# Altium PCB PCB2.PcbDoc
Units mil, origin at the board's own origin, x right, y up, seen from the top; angles counter-clockwise.
Board outline 2534.41 x 3224.79 mil, 2 copper layers (Top Layer, Bottom Layer); 9 components, 17 nets, 79 pads, 4 vias.
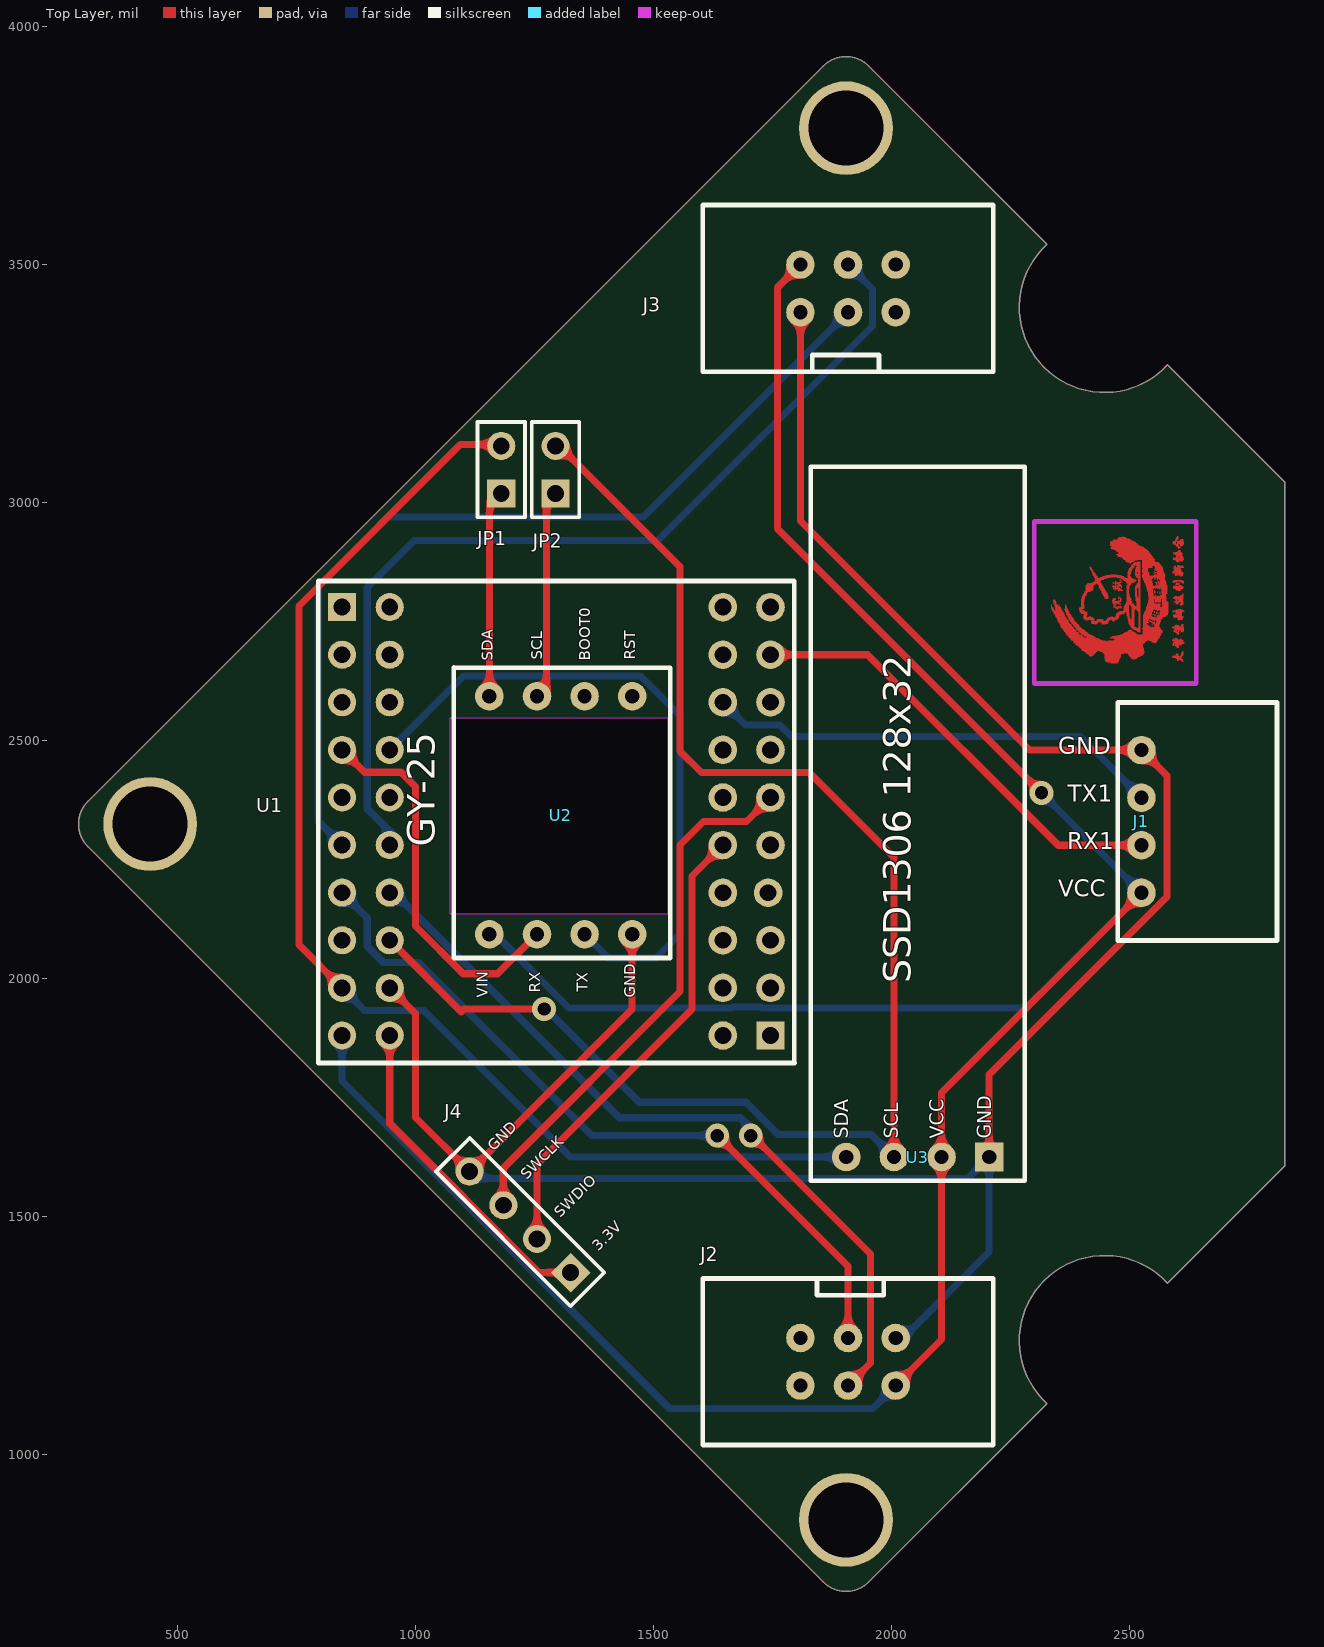
[diagram p0: Top Layer view]
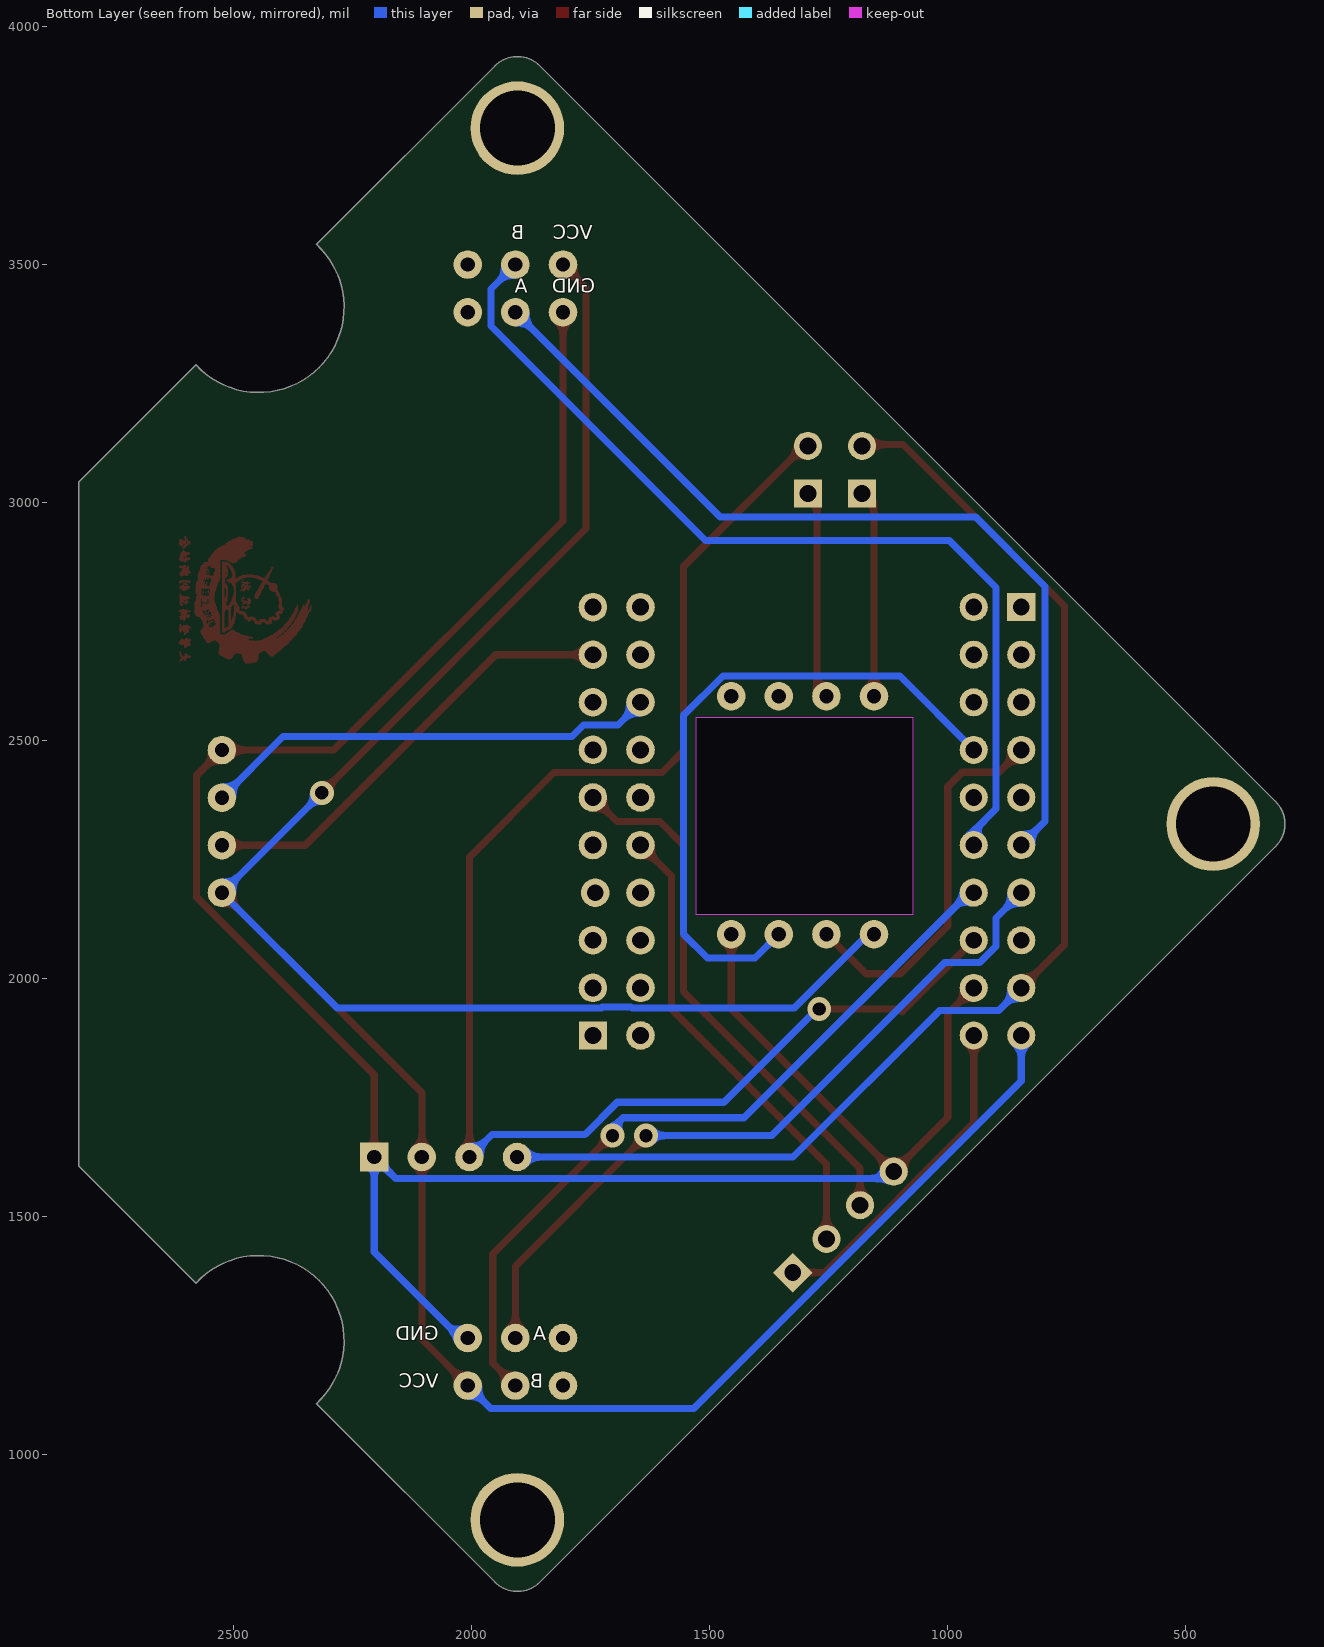
[diagram p1: Bottom Layer view, seen from below]

## Layer stack, top to bottom
Top Solder: solder mask 0.4, Solder Resist, Dk 3.5
Top Layer: signal copper 1.4
Dielectric 1: dielectric 12.6, FR-4, Dk 4.8
Bottom Layer: signal copper 1.4
Bottom Solder: solder mask 0.4, Solder Resist, Dk 3.5

## Board outline
1856.92,731.87 311.46,2277.34 cw(c358.78,2324.66) 311.46,2371.99 1856.92,3917.46 cw(c1904.25,3870.13) 1951.58,3917.46 2326.54,3542.49 ccw(c2447.52,3410.38) 2579.63,3289.4 2826.27,3042.76 2826.27,1606.57 2579.63,1359.93 ccw(c2447.52,1238.95) 2326.54,1106.84 1951.58,731.87 cw(c1904.25,779.2)
cut-out: 1073.03,2548.23 1483.02,2548.23 1530,2548.23 1530,2470 1530,2300 1530,2135.02 1310,2135.02 1195.02,2135.02 1138.01,2135.02 1108,2135.02 1080,2135.02 1073.03,2135.02 1073.03,2146.97 1073.03,2200 1073.03,2371.99

## Design rules (kind name [scope] priority, off if disabled: settings)
Clearance [All] p1: gap=5 ignorepadtopadclearanceinfootprint=FALSE except(0: Arc-Hole Track-Hole SMDPad-Hole THPad-Hole Via-Hole Fill-Hole Poly-Hole Region-Hole Text-Hole)
ComponentClearance [All] p1 off: gap=10 collisioncheckmode=3 verticalgap=10 showdistances=FALSE
PolygonConnect [All] p1: connectstyle=Relief reliefconductorwidth=10 reliefentries=4 polygonreliefangle="90 Angle" airgapwidth=10
RoutingVias [All] p1: holewidth=28 width=50 viastyle="Through Hole" minholewidth=28 minwidth=50 maxholewidth=28 maxwidth=50
SilkToSilkClearance [All] p1 off: silktosilkclearance=10
SilkToSolderMaskClearance [IsPad] p1 off: minsilkscreentomaskgap=10 clearancetoexposedcopper=TRUE
SolderMaskExpansion [All] p1: expansion=4
Width [All] p1: maxlimit=20 minlimit=10 preferedwidth=15 minimp=50.000000 maximp=50.000000 favimp=50.000000
27 further rules are at their usual default settings.

## Classes and differential pairs
component class Sheet1: J1 J3 J4 JP1 JP2

## Components (designator, comment, footprint, x,y, rotation, side; value= is the part's Value field where it differs from the comment)
J1 "XH2.54 x4" XH2.54 2425,2530 r0 top
J2 "ENcoder" 6pin2 2008.5,1244.82 r270 top
J3 "ENcoder" 6pin2 1808.5,3400 r90 top
J4 "Header 4" HDR1X4 1325.71,1382.28 r135 top
JP1 "Header 1" HDR1X2 1180,3019 r90 top
JP2 "Header 2" HDR1X2 1294,3019 r90 top
U1 "Stm32F103" STM32F103C8T6-4 845.59,2780.36 r0 top
U2 "GY25" PCBComponent_1 1155,2093 r90 top
U3 "SSD1306 128x32" "SSD1306 iic" 1830,1575 r90 top

## Footprints (in the part's own frame and the unit in brackets; to place one, negate y for a bottom-side part, rotate by r counter-clockwise, add the part's x,y. Pads: shape width x height; smd on the part's side, far side on the other; paste and mask are expansions set on the pad)
6pin2 [mil]
  round 60 hole 30: 1(0,0) 2(100,0) 3(0,-100) 4(100,-100) 5(0,-200) 6(100,-200)
  silkscreen extent -125,-405 225,205, body extent -125,-404 221,240, height 358
HDR1X2 [mm] "Connector; Header; 2 Position"
  rect 1.5x1.5 hole 0.9: 1(0,0)
  round 1.5 hole 0.9: 2(2.54,0)
  silkscreen extent -1.27,-1.27 3.81,1.27
HDR1X4 [mm] "Connector; Header; 4 Position"
  rect 1.5x1.5 hole 0.9: 1(0,0)
  round 1.5 hole 0.9: 2(2.54,0) 3(5.08,0) 4(7.62,0)
  silkscreen extent -1.27,-1.27 8.89,1.27
PCBComponent_1 [mil]
  round 60 hole 30: 1(0,0) 2(0,-100) 3(0,-200) 4(0,-300) 5(500,0) 6(500,-100) 7(500,-200) 8(500,-300)
  silkscreen extent -50,-380 560,75
"SSD1306 iic" [mil]
  round 60 hole 30: 1(50,-75) 2(50,-175) 3(50,-275)
  rect 60x60 hole 30: 4(50,-375)
  silkscreen extent 0,-450 1500,0, body extent 186,-361 1395,1, height 93
STM32F103C8T6-4 [mm]
  rect 1.5x1.5 hole 0.9: 1(0,0) 21(22.86,-22.86)
  round 1.5 hole 0.9: 2(2.54,0) 3(0,-2.54) 4(2.54,-2.54) 5(0,-5.08) 6(2.54,-5.08) 7(0,-7.62) 8(2.54,-7.62) 9(0,-10.16) 10(2.54,-10.16) 11(0,-12.7) 12(2.54,-12.7) 13(0,-15.24) 14(2.54,-15.24) 15(0,-17.78) 16(2.54,-17.78) 17(0,-20.32) 18(2.54,-20.32) 19(0,-22.86) 20(2.54,-22.86)
  round 1.524 hole 0.899: 22(20.32,-22.86) 23(22.86,-20.32) 24(20.32,-20.32) 25(22.86,-17.78) 26(20.32,-17.78) 27(22.733,-15.24) 28(20.32,-15.24) 29(22.86,-12.7) 30(20.32,-12.7) 31(22.86,-10.16) 32(20.32,-10.16) 33(22.86,-7.62) 34(20.32,-7.62) 35(22.86,-5.08) 36(20.32,-5.08) 37(22.86,-2.54) 38(20.32,-2.54) 39(22.86,0) 40(20.32,0)
  silkscreen extent -1.27,-24.33 24.16,1.4
XH2.54 [mil]
  round 60 hole 30: 1(100,-350) 2(100,-250) 3(100,-150) 4(100,-50)
  silkscreen extent 50,-450 385,50, body extent 85,-446 384,46, height 232

## Part data
J4: "Header, 4-Pin"
JP1: library part "Header 2", "Header, 2-Pin"
JP2: "Header, 2-Pin"
U1: library part Component_1

## Free pads (board coordinates)
  round 196.85 hole 157.48: 2(442.3,2324.66) 2(1904.25,862.72) 2(1904.25,3786.61)

## Via types
v1: diameter 50, hole 28, Top Layer to Bottom Layer, 4 vias

## Nets (pads, with @x,y where several pads share a name; then routed paths per layer and width w, separated by ;. In a path a pad name is that pad's centre, name@x,y a point inside that pad or via, vN(x,y) a via of type N, cw(c..) or ccw(c..) an arc to the next point about the centre after c; other vN are vias at no path point)
3.3V: J4.1 U1.20 | length 694.5
  Top Layer w15: U1.20 945.59,1695.9 1259.2,1382.28 J4.1
GND: J1.4 J2.1 J3.1 J4.4 U1.18 U2.4 U3.4 | length 5071.6
  Top Layer w15: U1.18 1000,1925.94 1000,1707.99 J4.4 1455,1935.83 U2.4 ; J3.1 1808.5,2961.5 2290,2480 J1.4 2578.8,2426.2 2578.8,2171.7 2205,1797.9 U3.4
  Bottom Layer w15: J4.4 1127.99,1580 2160,1580 U3.4 2205,1425.39 2024.43,1244.82 J2.1 ; U2.4@1455,2090.47 U2.4
INT0A: J2.3 U1.13 | length 1573.4
  Top Layer w15: v1(1633.9,1670) 1908.5,1395.4 J2.3
  Bottom Layer w15: U1.13 898.56,2127.39 898.56,2067.95 933.18,2033.33 1006.67,2033.33 1370,1670 v1(1633.9,1670)
INT0B: J2.4 U1.14 | length 1668.1
  Top Layer w15: v1(1704.29,1670) 1706.96,1670 1956,1420.97 1956,1192.32 J2.4
  Bottom Layer w15: U1.14@945.59,2161.81 U1.14 945.59,2189.77 1427.86,1707.5 1682.5,1707.5 1704.29,1685.71 v1(1704.29,1670) v1@1704.29,1663.71
INT1A: J3.3 U1.11 | length 1915.6
  Bottom Layer w15: U1.11 795.59,2330.36 795.59,2823.59 942,2970 1478.5,2970 J3.3
INT1B: J3.4 U1.12 | length 2000
  Bottom Layer w15: U1.12 945.59,2309.59 898.56,2356.61 898.56,2821.58 996.98,2920 1508.9,2920 1960,3371.1 1960,3448.5 J3.4
NetJP1_1: JP1.1 U2.5 | length 437.3
  Top Layer w15: U2.5 1155,3002 JP1.1@1175,3022
NetJP2_1: JP2.1 U2.6 | length 442.2
  Top Layer w15: U2.6 1275,2613 1275,3000 JP2.1
RX1: J1.2 U1.37 | length 945.2
  Top Layer w15: U1.37 1949.64,2680.36 2350,2280 J1.2
SCL: JP2.2 U1.16 U3.2 | length 3199.8
  Top Layer w15: U1.16 1095.94,1930 1101.78,1935.83 v1(1270,1935.83) ; JP2.2@1282.97,3126.18 1287.51,3133.15 1555.63,2865.02 1555.63,2477.7 1600.47,2432.86 1827.14,2432.86 2005,2255 U3.2
  Bottom Layer w15: v1@1265,1925 1285,1925 1470,1740 1694.4,1740 1761.9,1672.5 1957.5,1672.5 U3.2
SDA: JP1.2 U1.17 U3.1 | length 2607.3
  Top Layer w15: U1.17 754.87,2071.07 754.87,2782.87 1094,3122 JP1.2@1175,3122
  Bottom Layer w15: U1.17 893,1932.94 1017.06,1932.94 1325,1625 U3.1
stm32RX: U1.8 U2.3 | length 1409.8
  Bottom Layer w15: U1.8 1100.73,2635.5 1472.6,2635.5 1555.63,2552.47 1555.63,2093.74 1504.9,2043 1405,2043 U2.3
stm32TX: U1.7 U2.2 | length 810.2
  Top Layer w15: U1.7 892.61,2433.33 969.67,2433.33 1000,2403 1000,2110.06 1100.06,2010 1172,2010 U2.2
SWCLK: J4.3 U1.31 | length 1142
  Top Layer w15: J4.3 1184.29,1601.27 1555.63,1972.62 1555.63,2280.69 1604.95,2330 1695.23,2330 U1.31
SWDIO: J4.2 U1.30 | length 989.2
  Top Layer w15: J4.2 1255,1610 1580.63,1935.63 1580.63,2215.41 U1.30
TX1: J1.3 U1.36 | length 962.4
  Bottom Layer w15: U1.36 1693.09,2532.86 1765.26,2532.86 1789.73,2508.39 2396.61,2508.39 J1.3
VCC: J1.1 J2.2 J3.2 U1.19 U2.1 U3.3 | length 6028.1
  Top Layer w15: J3.2 1760,3451.5 1760,2945.23 2315,2390.23 v1(2315,2390) ; J2.2 2105,1241.32 U3.3 2105,1760 J1.1 J1.1@2525,2202.3
  Bottom Layer w15: U1.19 845.59,1784.41 1533,1097 1960.68,1097 J2.2 ; U2.1 1167.37,2093 1322.51,1937.86 1663.19,1937.86 1665.33,1940 1725.84,1940 1727.98,1937.86 2282.86,1937.86 J1.1 v1(2315,2390)
pads on no net: J2.5 J2.6 J3.5 J3.6 U1.1 U1.2 U1.3 U1.4 U1.5 U1.6 U1.9 U1.10 U1.15 U1.21 U1.22 U1.23 U1.24 U1.25 U1.26 U1.27 U1.28 U1.29 U1.32 U1.33 U1.34 U1.35 U1.38 U1.39 U1.40 U2.7 U2.8
copper on no net: | length 18448.3
  Top Layer w1.3: 2337,2775.8 2337,2784.9 ; 2338.3,2771.9 2338.3,2779.7 ; 2339.6,2771.9 2339.6,2779.7 ; 2340.9,2770.6 2340.9,2775.8 ; 2340.9,2790.1 2340.9,2795.3 ; 2342.2,2766.7 2342.2,2774.5 ; 2342.2,2787.5 2342.2,2795.3 ; 2343.5,2765.4 2343.5,2773.2 ; 2343.5,2782.3 2343.5,2795.3 ; 2344.8,2761.5 2344.8,2773.2 ; 2344.8,2775.8 2344.8,2792.7 ; 2346.1,2758.9 2346.1,2790.1 ; 2347.4,2757.6 2347.4,2786.2 ; 2348.7,2753.7 2348.7,2784.9 ; 2350,2751.1 2350,2782.3 ; 2351.3,2748.5 2351.3,2782.3 ; 2352.6,2747.2 2352.6,2784.9 ; 2353.9,2744.6 2353.9,2781 ; 2355.2,2742 2355.2,2779.7 ; 2356.5,2739.4 2356.5,2777.1 ; 2357.8,2736.8 2357.8,2775.8 ; 2359.1,2735.5 2359.1,2773.2 ; 2360.4,2734.2 2360.4,2770.6 ; 2361.7,2731.6 2361.7,2768 ; 2363,2730.3 2363,2766.7 ; 2364.3,2729 2364.3,2764.1 ; 2364.3,2774.5 2364.3,2775.8 ; 2365.6,2726.4 2365.6,2760.2 ; 2365.6,2770.6 2365.6,2784.9 ; 2366.9,2725.1 2366.9,2757.6 ; 2366.9,2769.3 2366.9,2783.6 ; 2368.2,2722.5 2368.2,2756.3 ; 2368.2,2765.4 2368.2,2781 ; 2369.5,2721.2 2369.5,2755 ; 2369.5,2762.8 2369.5,2778.4 ; 2370.8,2719.9 2370.8,2752.4 ; 2370.8,2758.9 2370.8,2774.5 ; 2372.1,2718.6 2372.1,2749.8 ; 2372.1,2757.6 2372.1,2771.9 ; 2373.4,2717.3 2373.4,2747.2 ; 2373.4,2753.7 2373.4,2769.3 ; 2374.7,2716 2374.7,2745.9 ; 2374.7,2752.4 2374.7,2766.7 ; 2376,2714.7 2376,2744.6 ; 2376,2751.1 2376,2765.4 ; 2377.3,2712.1 2377.3,2743.3 ; 2377.3,2749.8 2377.3,2762.8 ; 2378.6,2710.8 2378.6,2740.7 ; 2378.6,2747.2 2378.6,2760.2 ; 2379.9,2710.8 2379.9,2739.4 ; 2379.9,2745.9 2379.9,2758.9 ; 2381.2,2709.5 2381.2,2738.1 ; 2381.2,2743.3 2381.2,2757.6 ; 2382.5,2708.2 2382.5,2736.8 ; 2382.5,2742 2382.5,2755 ; 2383.8,2705.6 2383.8,2734.2 ; 2383.8,2740.7 2383.8,2753.7 ; 2385.1,2704.3 2385.1,2734.2 ; 2385.1,2739.4 2385.1,2751.1 ; 2386.4,2704.3 2386.4,2732.9 ; 2386.4,2738.1 2386.4,2749.8 ; 2387.7,2701.7 2387.7,2731.6 ; 2387.7,2735.5 2387.7,2748.5 ; 2389,2701.7 2389,2729 ; 2389,2734.2 2389,2747.2 ; 2390.3,2700.4 2390.3,2727.7 ; 2390.3,2732.9 2390.3,2745.9 ; 2391.6,2699.1 2391.6,2727.7 ; 2391.6,2731.6 2391.6,2744.6 ; 2392.9,2697.8 2392.9,2726.4 ; 2392.9,2730.3 2392.9,2743.3 ; 2394.2,2697.8 2394.2,2723.8 ; 2394.2,2729 2394.2,2740.7 ; 2395.5,2696.5 2395.5,2722.5 ; 2395.5,2727.7 2395.5,2739.4 ; 2395.5,2774.5 2395.5,2778.4 ; 2396.8,2695.2 2396.8,2722.5 ; 2396.8,2726.4 2396.8,2738.1 ; 2396.8,2769.3 2396.8,2779.7 ; 2398.1,2692.6 2398.1,2721.2 ; 2398.1,2725.1 2398.1,2736.8 ; 2398.1,2768 2398.1,2779.7 ; 2399.4,2691.3 2399.4,2721.2 ; 2399.4,2723.8 2399.4,2735.5 ; 2399.4,2766.7 2399.4,2796.6 ; 2400.7,2690 2400.7,2719.9 ; 2400.7,2722.5 2400.7,2734.2 ; 2400.7,2766.7 2400.7,2800.5 ; 2402,2688.7 2402,2718.6 ; 2402,2722.5 2402,2734.2 ; 2402,2766.7 2402,2773.2 ; 2402,2775.8 2402,2804.4 ; 2403.3,2688.7 2403.3,2717.3 ; 2403.3,2721.2 2403.3,2732.9 ; 2403.3,2757.6 2403.3,2760.2 ; 2403.3,2766.7 2403.3,2773.2 ; 2403.3,2777.1 2403.3,2807 ; 2404.6,2687.4 2404.6,2717.3 ; 2404.6,2721.2 2404.6,2732.9 ; 2404.6,2756.3 2404.6,2762.8 ; 2404.6,2766.7 2404.6,2773.2 ; 2404.6,2778.4 2404.6,2784.9 ; 2404.6,2792.7 2404.6,2809.6 ; 2405.9,2686.1 2405.9,2714.7 ; 2405.9,2718.6 2405.9,2731.6 ; 2405.9,2755 2405.9,2773.2 ; 2405.9,2799.2 2405.9,2810.9 ; 2407.2,2686.1 2407.2,2714.7 ; 2407.2,2718.6 2407.2,2730.3 ; 2407.2,2753.7 2407.2,2771.9 ; 2407.2,2803.1 2407.2,2813.5 ; 2408.5,2684.8 2408.5,2714.7 ; 2408.5,2717.3 2408.5,2729 ; 2408.5,2752.4 2408.5,2770.6 ; 2408.5,2804.4 2408.5,2826.5 ; 2409.8,2683.5 2409.8,2714.7 ; 2409.8,2717.3 2409.8,2727.7 ; 2409.8,2752.4 2409.8,2758.9 ; 2409.8,2761.5 2409.8,2769.3 ; 2409.8,2807 2409.8,2827.8 ; 2411.1,2682.2 2411.1,2726.4 ; 2411.1,2752.4 2411.1,2757.6 ; 2411.1,2764.1 2411.1,2768 ; 2411.1,2809.6 2411.1,2827.8 ; 2412.4,2682.2 2412.4,2726.4 ; 2412.4,2752.4 2412.4,2757.6 ; 2412.4,2812.2 2412.4,2829.1 ; 2413.7,2680.9 2413.7,2725.1 ; 2413.7,2752.4 2413.7,2758.9 ; 2413.7,2812.2 2413.7,2830.4 ; 2415,2679.6 2415,2723.8 ; 2415,2753.7 2415,2760.2 ; 2415,2812.2 2415,2830.4 ; 2416.3,2678.3 2416.3,2723.8 ; 2416.3,2753.7 2416.3,2760.2 ; 2416.3,2812.2 2416.3,2830.4 ; 2417.6,2677 2417.6,2722.5 ; 2417.6,2755 2417.6,2761.5 ; 2417.6,2812.2 2417.6,2830.4 ; 2417.6,2861.6 2417.6,2865.5 ; 2418.9,2677 2418.9,2721.2 ; 2418.9,2753.7 2418.9,2760.2 ; 2418.9,2813.5 2418.9,2830.4 ; 2418.9,2859 2418.9,2864.2 ; 2420.2,2677 2420.2,2721.2 ; 2420.2,2747.2 2420.2,2758.9 ; 2420.2,2814.8 2420.2,2830.4 ; 2420.2,2856.4 2420.2,2862.9 ; 2421.5,2677 2421.5,2721.2 ; 2421.5,2745.9 2421.5,2758.9 ; 2421.5,2814.8 2421.5,2830.4 ; 2421.5,2853.8 2421.5,2860.3 ; 2422.8,2678.3 2422.8,2719.9 ; 2422.8,2745.9 2422.8,2757.6 ; 2422.8,2816.1 2422.8,2831.7 ; 2422.8,2851.2 2422.8,2857.7 ; 2424.1,2679.6 2424.1,2718.6 ; 2424.1,2745.9 2424.1,2757.6 ; 2424.1,2817.4 2424.1,2833 ; 2424.1,2847.3 2424.1,2856.4 ; 2425.4,2680.9 2425.4,2718.6 ; 2425.4,2745.9 2425.4,2756.3 ; 2425.4,2826.5 2425.4,2833 ; 2425.4,2844.7 2425.4,2853.8 ; 2426.7,2682.2 2426.7,2717.3 ; 2426.7,2744.6 2426.7,2751.1 ; 2426.7,2827.8 2426.7,2834.3 ; 2426.7,2842.1 2426.7,2852.5 ; 2428,2683.5 2428,2717.3 ; 2428,2744.6 2428,2751.1 ; 2428,2827.8 2428,2835.6 ; 2428,2840.8 2428,2851.2 ; 2429.3,2684.8 2429.3,2716 ; 2429.3,2744.6 2429.3,2751.1 ; 2429.3,2829.1 2429.3,2848.6 ; 2430.6,2686.1 2430.6,2714.7 ; 2430.6,2744.6 2430.6,2751.1 ; 2430.6,2830.4 2430.6,2846 ; 2431.9,2687.4 2431.9,2714.7 ; 2431.9,2745.9 2431.9,2753.7 ; 2431.9,2830.4 2431.9,2844.7 ; 2433.2,2688.7 2433.2,2714.7 ; 2433.2,2747.2 2433.2,2755 ; 2433.2,2829.1 2433.2,2842.1 ; 2434.5,2688.7 2434.5,2713.4 ; 2434.5,2748.5 2434.5,2755 ; 2434.5,2827.8 2434.5,2840.8 ; 2435.8,2688.7 2435.8,2713.4 ; 2435.8,2748.5 2435.8,2755 ; 2435.8,2825.2 2435.8,2840.8 ; 2437.1,2688.7 2437.1,2712.1 ; 2437.1,2749.8 2437.1,2755 ; 2437.1,2821.3 2437.1,2840.8 ; 2438.4,2687.4 2438.4,2712.1 ; 2438.4,2749.8 2438.4,2755 ; 2438.4,2818.7 2438.4,2842.1 ; 2439.7,2687.4 2439.7,2712.1 ; 2439.7,2749.8 2439.7,2755 ; 2439.7,2817.4 2439.7,2831.7 ; 2439.7,2835.6 2439.7,2842.1 ; 2441,2686.1 2441,2710.8 ; 2441,2747.2 2441,2755 ; 2441,2814.8 2441,2830.4 ; 2441,2836.9 2441,2843.4 ; 2442.3,2686.1 2442.3,2710.8 ; 2442.3,2744.6 2442.3,2755 ; 2442.3,2810.9 2442.3,2827.8 ; 2442.3,2838.2 2442.3,2843.4 ; 2443.6,2686.1 2443.6,2709.5 ; 2443.6,2744.6 2443.6,2755 ; 2443.6,2808.3 2443.6,2825.2 ; 2443.6,2838.2 2443.6,2843.4 ; 2444.9,2684.8 2444.9,2709.5 ; 2444.9,2744.6 2444.9,2753.7 ; 2444.9,2807 2444.9,2823.9 ; 2444.9,2838.2 2444.9,2844.7 ; 2446.2,2683.5 2446.2,2709.5 ; 2446.2,2744.6 2446.2,2751.1 ; 2446.2,2804.4 2446.2,2821.3 ; 2446.2,2838.2 2446.2,2844.7 ; 2447.5,2680.9 2447.5,2709.5 ; 2447.5,2744.6 2447.5,2751.1 ; 2447.5,2801.8 2447.5,2818.7 ; 2447.5,2839.5 2447.5,2844.7 ; 2448.8,2670.5 2448.8,2709.5 ; 2448.8,2744.6 2448.8,2751.1 ; 2448.8,2799.2 2448.8,2816.1 ; 2448.8,2839.5 2448.8,2846 ; 2450.1,2667.9 2450.1,2709.5 ; 2450.1,2744.6 2450.1,2751.1 ; 2450.1,2797.9 2450.1,2814.8 ; 2450.1,2839.5 2450.1,2846 ; 2451.4,2665.3 2451.4,2708.2 ; 2451.4,2745.9 2451.4,2752.4 ; 2451.4,2797.9 2451.4,2812.2 ; 2451.4,2840.8 2451.4,2846 ; 2452.7,2664 2452.7,2708.2 ; 2452.7,2745.9 2452.7,2755 ; 2452.7,2797.9 2452.7,2810.9 ; 2452.7,2840.8 2452.7,2847.3 ; 2454,2664 2454,2708.2 ; 2454,2745.9 2454,2756.3 ; 2454,2799.2 2454,2808.3 ; 2454,2840.8 2454,2847.3 ; 2455.3,2664 2455.3,2709.5 ; 2455.3,2747.2 2455.3,2757.6 ; 2455.3,2799.2 2455.3,2805.7 ; 2455.3,2842.1 2455.3,2847.3 ; 2456.6,2664 2456.6,2709.5 ; 2456.6,2751.1 2456.6,2757.6 ; 2456.6,2842.1 2456.6,2847.3 ; 2457.9,2664 2457.9,2709.5 ; 2457.9,2752.4 2457.9,2757.6 ; 2457.9,2842.1 2457.9,2847.3 ; 2459.2,2662.7 2459.2,2708.2 ; 2459.2,2753.7 2459.2,2758.9 ; 2459.2,2843.4 2459.2,2847.3 ; 2460.5,2664 2460.5,2709.5 ; 2460.5,2714.7 2460.5,2717.3 ; 2460.5,2753.7 2460.5,2758.9 ; 2460.5,2843.4 2460.5,2848.6 ; 2460.5,2909.7 2460.5,2916.2 ; 2461.8,2664 2461.8,2709.5 ; 2461.8,2714.7 2461.8,2717.3 ; 2461.8,2753.7 2461.8,2760.2 ; 2461.8,2843.4 2461.8,2848.6 ; 2461.8,2904.5 2461.8,2905.8 ; 2461.8,2909.7 2461.8,2918.8 ; 2463.1,2662.7 2463.1,2709.5 ; 2463.1,2714.7 2463.1,2717.3 ; 2463.1,2753.7 2463.1,2760.2 ; 2463.1,2843.4 2463.1,2848.6 ; 2463.1,2903.2 2463.1,2905.8 ; 2463.1,2908.4 2463.1,2918.8 ; 2464.4,2662.7 2464.4,2709.5 ; 2464.4,2714.7 2464.4,2718.6 ; 2464.4,2752.4 2464.4,2760.2 ; 2464.4,2791.4 2464.4,2795.3 ; 2464.4,2823.9 2464.4,2825.2 ; 2464.4,2843.4 2464.4,2848.6 ; 2464.4,2903.2 2464.4,2905.8 ; 2464.4,2907.1 2464.4,2918.8 ; 2465.7,2662.7 2465.7,2709.5 ; 2465.7,2714.7 2465.7,2718.6 ; 2465.7,2751.1 2465.7,2758.9 ; 2465.7,2788.8 2465.7,2790.1 ; 2465.7,2791.4 2465.7,2795.3 ; 2465.7,2821.3 2465.7,2825.2 ; 2465.7,2830.4 2465.7,2833 ; 2465.7,2843.4 2465.7,2848.6 ; 2465.7,2901.9 2465.7,2905.8 ; 2465.7,2907.1 2465.7,2920.1 ; 2467,2662.7 2467,2709.5 ; 2467,2714.7 2467,2717.3 ; 2467,2751.1 2467,2758.9 ; 2467,2779.7 2467,2782.3 ; 2467,2786.2 2467,2799.2 ; 2467,2818.7 2467,2821.3 ; 2467,2822.6 2467,2823.9 ; 2467,2830.4 2467,2833 ; 2467,2843.4 2467,2848.6 ; 2467,2901.9 2467,2921.4 ; 2468.3,2662.7 2468.3,2710.8 ; 2468.3,2713.4 2468.3,2718.6 ; 2468.3,2751.1 2468.3,2757.6 ; 2468.3,2779.7 2468.3,2783.6 ; 2468.3,2786.2 2468.3,2799.2 ; 2468.3,2817.4 2468.3,2820 ; 2468.3,2822.6 2468.3,2825.2 ; 2468.3,2830.4 2468.3,2831.7 ; 2468.3,2843.4 2468.3,2848.6 ; 2468.3,2900.6 2468.3,2921.4 ; 2469.6,2662.7 2469.6,2718.6 ; 2469.6,2752.4 2469.6,2758.9 ; 2469.6,2779.7 2469.6,2794 ; 2469.6,2795.3 2469.6,2799.2 ; 2469.6,2816.1 2469.6,2825.2 ; 2469.6,2829.1 2469.6,2830.4 ; 2469.6,2843.4 2469.6,2848.6 ; 2469.6,2900.6 2469.6,2921.4 ; 2470.9,2662.7 2470.9,2718.6 ; 2470.9,2753.7 2470.9,2758.9 ; 2470.9,2779.7 2470.9,2781 ; 2470.9,2784.9 2470.9,2787.5 ; 2470.9,2790.1 2470.9,2792.7 ; 2470.9,2795.3 2470.9,2797.9 ; 2470.9,2817.4 2470.9,2825.2 ; 2470.9,2827.8 2470.9,2834.3 ; 2470.9,2843.4 2470.9,2848.6 ; 2470.9,2899.3 2470.9,2921.4 ; 2472.2,2662.7 2472.2,2719.9 ; 2472.2,2753.7 2472.2,2762.8 ; 2472.2,2777.1 2472.2,2781 ; 2472.2,2786.2 2472.2,2787.5 ; 2472.2,2790.1 2472.2,2792.7 ; 2472.2,2817.4 2472.2,2821.3 ; 2472.2,2822.6 2472.2,2825.2 ; 2472.2,2826.5 2472.2,2833 ; 2472.2,2843.4 2472.2,2848.6 ; 2472.2,2899.3 2472.2,2921.4 ; 2473.5,2662.7 2473.5,2719.9 ; 2473.5,2755 2473.5,2766.7 ; 2473.5,2777.1 2473.5,2781 ; 2473.5,2788.8 2473.5,2792.7 ; 2473.5,2817.4 2473.5,2821.3 ; 2473.5,2823.9 2473.5,2825.2 ; 2473.5,2830.4 2473.5,2833 ; 2473.5,2843.4 2473.5,2848.6 ; 2473.5,2890.2 2473.5,2891.5 ; 2473.5,2898 2473.5,2921.4 ; 2474.8,2662.7 2474.8,2719.9 ; 2474.8,2755 2474.8,2768 ; 2474.8,2775.8 2474.8,2781 ; 2474.8,2788.8 2474.8,2792.7 ; 2474.8,2817.4 2474.8,2826.5 ; 2474.8,2829.1 2474.8,2831.7 ; 2474.8,2842.1 2474.8,2847.3 ; 2474.8,2888.9 2474.8,2891.5 ; 2474.8,2898 2474.8,2922.7 ; 2476.1,2664 2476.1,2719.9 ; 2476.1,2756.3 2476.1,2768 ; 2476.1,2777.1 2476.1,2779.7 ; 2476.1,2787.5 2476.1,2794 ; 2476.1,2816.1 2476.1,2826.5 ; 2476.1,2829.1 2476.1,2833 ; 2476.1,2842.1 2476.1,2847.3 ; 2476.1,2887.6 2476.1,2891.5 ; 2476.1,2896.7 2476.1,2924 ; 2477.4,2665.3 2477.4,2721.2 ; 2477.4,2757.6 2477.4,2758.9 ; 2477.4,2760.2 2477.4,2769.3 ; 2477.4,2781 2477.4,2782.3 ; 2477.4,2787.5 2477.4,2794 ; 2477.4,2797.9 2477.4,2800.5 ; 2477.4,2814.8 2477.4,2821.3 ; 2477.4,2823.9 2477.4,2825.2 ; 2477.4,2827.8 2477.4,2833 ; 2477.4,2842.1 2477.4,2847.3 ; 2477.4,2887.6 2477.4,2892.8 ; 2477.4,2895.4 2477.4,2925.3 ; 2478.7,2669.2 2478.7,2721.2 ; 2478.7,2762.8 2478.7,2770.6 ; 2478.7,2779.7 2478.7,2782.3 ; 2478.7,2786.2 2478.7,2788.8 ; 2478.7,2790.1 2478.7,2794 ; 2478.7,2799.2 2478.7,2801.8 ; 2478.7,2813.5 2478.7,2821.3 ; 2478.7,2823.9 2478.7,2825.2 ; 2478.7,2826.5 2478.7,2833 ; 2478.7,2842.1 2478.7,2847.3 ; 2478.7,2886.3 2478.7,2926.6 ; 2480,2673.1 2480,2721.2 ; 2480,2762.8 2480,2771.9 ; 2480,2778.4 2480,2781 ; 2480,2786.2 2480,2787.5 ; 2480,2790.1 2480,2794 ; 2480,2799.2 2480,2800.5 ; 2480,2816.1 2480,2821.3 ; 2480,2823.9 2480,2829.1 ; 2480,2831.7 2480,2833 ; 2480,2836.9 2480,2838.2 ; 2480,2840.8 2480,2847.3 ; 2480,2886.3 2480,2926.6 ; 2481.3,2675.7 2481.3,2722.5 ; 2481.3,2765.4 2481.3,2771.9 ; 2481.3,2778.4 2481.3,2782.3 ; 2481.3,2784.9 2481.3,2786.2 ; 2481.3,2791.4 2481.3,2795.3 ; 2481.3,2796.6 2481.3,2800.5 ; 2481.3,2816.1 2481.3,2817.4 ; 2481.3,2823.9 2481.3,2827.8 ; 2481.3,2831.7 2481.3,2833 ; 2481.3,2836.9 2481.3,2838.2 ; 2481.3,2840.8 2481.3,2847.3 ; 2481.3,2885 2481.3,2926.6 ; 2482.6,2680.9 2482.6,2722.5 ; 2482.6,2765.4 2482.6,2771.9 ; 2482.6,2778.4 2482.6,2782.3 ; 2482.6,2792.7 2482.6,2799.2 ; 2482.6,2814.8 2482.6,2817.4 ; 2482.6,2822.6 2482.6,2826.5 ; 2482.6,2831.7 2482.6,2836.9 ; 2482.6,2840.8 2482.6,2846 ; 2482.6,2885 2482.6,2926.6 ; 2483.9,2682.2 2483.9,2722.5 ; 2483.9,2766.7 2483.9,2771.9 ; 2483.9,2814.8 2483.9,2817.4 ; 2483.9,2821.3 2483.9,2825.2 ; 2483.9,2839.5 2483.9,2846 ; 2483.9,2885 2483.9,2926.6 ; 2485.2,2682.2 2485.2,2723.8 ; 2485.2,2766.7 2485.2,2771.9 ; 2485.2,2814.8 2485.2,2816.1 ; 2485.2,2839.5 2485.2,2844.7 ; 2485.2,2883.7 2485.2,2926.6 ; 2486.5,2682.2 2486.5,2723.8 ; 2486.5,2765.4 2486.5,2771.9 ; 2486.5,2838.2 2486.5,2844.7 ; 2486.5,2882.4 2486.5,2927.9 ; 2487.8,2682.2 2487.8,2725.1 ; 2487.8,2765.4 2487.8,2773.2 ; 2487.8,2838.2 2487.8,2844.7 ; 2487.8,2881.1 2487.8,2927.9 ; 2489.1,2683.5 2489.1,2725.1 ; 2489.1,2766.7 2489.1,2774.5 ; 2489.1,2775.8 2489.1,2781 ; 2489.1,2836.9 2489.1,2843.4 ; 2489.1,2881.1 2489.1,2926.6 ; 2490.4,2683.5 2490.4,2726.4 ; 2490.4,2768 2490.4,2783.6 ; 2490.4,2835.6 2490.4,2842.1 ; 2490.4,2879.8 2490.4,2926.6 ; 2491.7,2683.5 2491.7,2726.4 ; 2491.7,2769.3 2491.7,2786.2 ; 2491.7,2834.3 2491.7,2842.1 ; 2491.7,2878.5 2491.7,2926.6 ; 2493,2683.5 2493,2727.7 ; 2493,2769.3 2493,2787.5 ; 2493,2834.3 2493,2840.8 ; 2493,2877.2 2493,2925.3 ; 2494.3,2683.5 2494.3,2727.7 ; 2494.3,2769.3 2494.3,2790.1 ; 2494.3,2833 2494.3,2840.8 ; 2494.3,2875.9 2494.3,2925.3 ; 2495.6,2683.5 2495.6,2729 ; 2495.6,2761.5 2495.6,2826.5 ; 2495.6,2830.4 2495.6,2840.8 ; 2495.6,2874.6 2495.6,2924 ; 2496.9,2682.2 2496.9,2729 ; 2496.9,2755 2496.9,2853.8 ; 2496.9,2874.6 2496.9,2924 ; 2498.2,2680.9 2498.2,2730.3 ; 2498.2,2751.1 2498.2,2856.4 ; 2498.2,2874.6 2498.2,2924 ; 2499.5,2679.6 2499.5,2731.6 ; 2499.5,2745.9 2499.5,2768 ; 2499.5,2784.9 2499.5,2810.9 ; 2499.5,2818.7 2499.5,2860.3 ; 2499.5,2873.3 2499.5,2922.7 ; 2500.8,2677 2500.8,2731.6 ; 2500.8,2743.3 2500.8,2760.2 ; 2500.8,2786.2 2500.8,2804.4 ; 2500.8,2825.2 2500.8,2861.6 ; 2500.8,2872 2500.8,2922.7 ; 2502.1,2675.7 2502.1,2732.9 ; 2502.1,2740.7 2502.1,2756.3 ; 2502.1,2784.9 2502.1,2800.5 ; 2502.1,2827.8 2502.1,2844.7 ; 2502.1,2849.9 2502.1,2864.2 ; 2502.1,2872 2502.1,2921.4 ; 2503.4,2674.4 2503.4,2731.6 ; 2503.4,2739.4 2503.4,2753.7 ; 2503.4,2783.6 2503.4,2797.9 ; 2503.4,2829.1 2503.4,2843.4 ; 2503.4,2853.8 2503.4,2865.5 ; 2503.4,2873.3 2503.4,2921.4 ; 2504.7,2673.1 2504.7,2731.6 ; 2504.7,2736.8 2504.7,2751.1 ; 2504.7,2781 2504.7,2792.7 ; 2504.7,2831.7 2504.7,2840.8 ; 2504.7,2856.4 2504.7,2866.8 ; 2504.7,2874.6 2504.7,2920.1 ; 2506,2671.8 2506,2730.3 ; 2506,2735.5 2506,2790.1 ; 2506,2831.7 2506,2839.5 ; 2506,2859 2506,2869.4 ; 2506,2875.9 2506,2920.1 ; 2507.3,2670.5 2507.3,2729 ; 2507.3,2734.2 2507.3,2787.5 ; 2507.3,2831.7 2507.3,2839.5 ; 2507.3,2861.6 2507.3,2870.7 ; 2507.3,2875.9 2507.3,2918.8 ; 2508.6,2670.5 2508.6,2729 ; 2508.6,2734.2 2508.6,2786.2 ; 2508.6,2833 2508.6,2839.5 ; 2508.6,2862.9 2508.6,2872 ; 2508.6,2877.2 2508.6,2918.8 ; 2509.9,2670.5 2509.9,2727.7 ; 2509.9,2734.2 2509.9,2784.9 ; 2509.9,2833 2509.9,2839.5 ; 2509.9,2864.2 2509.9,2873.3 ; 2509.9,2877.2 2509.9,2917.5 ; 2511.2,2670.5 2511.2,2727.7 ; 2511.2,2732.9 2511.2,2739.4 ; 2511.2,2774.5 2511.2,2783.6 ; 2511.2,2833 2511.2,2838.2 ; 2511.2,2866.8 2511.2,2873.3 ; 2511.2,2877.2 2511.2,2917.5 ; 2512.5,2671.8 2512.5,2726.4 ; 2512.5,2731.6 2512.5,2738.1 ; 2512.5,2775.8 2512.5,2782.3 ; 2512.5,2801.8 2512.5,2822.6 ; 2512.5,2834.3 2512.5,2838.2 ; 2512.5,2847.3 2512.5,2859 ; 2512.5,2868.1 2512.5,2874.6 ; 2512.5,2878.5 2512.5,2916.2 ; 2513.8,2671.8 2513.8,2725.1 ; 2513.8,2731.6 2513.8,2736.8 ; 2513.8,2775.8 2513.8,2781 ; 2513.8,2794 2513.8,2825.2 ; 2513.8,2835.6 2513.8,2838.2 ; 2513.8,2844.7 2513.8,2862.9 ; 2513.8,2868.1 2513.8,2874.6 ; 2513.8,2878.5 2513.8,2913.6 ; 2515.1,2673.1 2515.1,2723.8 ; 2515.1,2731.6 2515.1,2736.8 ; 2515.1,2775.8 2515.1,2782.3 ; 2515.1,2791.4 2515.1,2826.5 ; 2515.1,2843.4 2515.1,2864.2 ; 2515.1,2868.1 2515.1,2874.6 ; 2515.1,2878.5 2515.1,2914.9 ; 2516.4,2674.4 2516.4,2723.8 ; 2516.4,2730.3 2516.4,2735.5 ; 2516.4,2774.5 2516.4,2805.7 ; 2516.4,2820 2516.4,2829.1 ; 2516.4,2843.4 2516.4,2851.2 ; 2516.4,2853.8 2516.4,2874.6 ; 2516.4,2878.5 2516.4,2914.9 ; 2517.7,2674.4 2517.7,2722.5 ; 2517.7,2729 2517.7,2735.5 ; 2517.7,2773.2 2517.7,2800.5 ; 2517.7,2821.3 2517.7,2830.4 ; 2517.7,2842.1 2517.7,2849.9 ; 2517.7,2855.1 2517.7,2875.9 ; 2517.7,2879.8 2517.7,2911 ; 2519,2675.7 2519,2722.5 ; 2519,2727.7 2519,2736.8 ; 2519,2770.6 2519,2800.5 ; 2519,2821.3 2519,2875.9 ; 2519,2879.8 2519,2911 ; 2520.3,2675.7 2520.3,2722.5 ; 2520.3,2727.7 2520.3,2875.9 ; 2520.3,2879.8 2520.3,2909.7 ; 2521.6,2675.7 2521.6,2722.5 ; 2521.6,2727.7 2521.6,2875.9 ; 2521.6,2879.8 2521.6,2909.7 ; 2522.9,2677 2522.9,2722.5 ; 2522.9,2727.7 2522.9,2875.9 ; 2522.9,2879.8 2522.9,2909.7 ; 2524.2,2678.3 2524.2,2722.5 ; 2524.2,2879.8 2524.2,2908.4 ; 2525.5,2678.3 2525.5,2722.5 ; 2525.5,2879.8 2525.5,2907.1 ; 2526.8,2679.6 2526.8,2722.5 ; 2526.8,2879.8 2526.8,2907.1 ; 2528.1,2679.6 2528.1,2723.8 ; 2528.1,2727.7 2528.1,2729 ; 2528.1,2734.2 2528.1,2735.5 ; 2528.1,2842.1 2528.1,2849.9 ; 2528.1,2852.5 2528.1,2860.3 ; 2528.1,2861.6 2528.1,2862.9 ; 2528.1,2864.2 2528.1,2875.9 ; 2528.1,2877.2 2528.1,2907.1 ; 2529.4,2680.9 2529.4,2695.2 ; 2529.4,2703 2529.4,2764.1 ; 2529.4,2838.2 2529.4,2905.8 ; 2530.7,2683.5 2530.7,2687.4 ; 2530.7,2704.3 2530.7,2766.7 ; 2530.7,2835.6 2530.7,2904.5 ; 2532,2705.6 2532,2769.3 ; 2532,2833 2532,2904.5 ; 2533.3,2706.9 2533.3,2771.9 ; 2533.3,2830.4 2533.3,2903.2 ; 2534.6,2708.2 2534.6,2774.5 ; 2534.6,2826.5 2534.6,2901.9 ; 2535.9,2709.5 2535.9,2745.9 ; 2535.9,2747.2 2535.9,2779.7 ; 2535.9,2822.6 2535.9,2900.6 ; 2537.2,2710.8 2537.2,2744.6 ; 2537.2,2747.2 2537.2,2782.3 ; 2537.2,2818.7 2537.2,2899.3 ; 2538.5,2710.8 2538.5,2740.7 ; 2538.5,2747.2 2538.5,2787.5 ; 2538.5,2813.5 2538.5,2899.3 ; 2539.8,2710.8 2539.8,2740.7 ; 2539.8,2747.2 2539.8,2748.5 ; 2539.8,2752.4 2539.8,2794 ; 2539.8,2803.1 2539.8,2853.8 ; 2539.8,2861.6 2539.8,2898 ; 2541.1,2710.8 2541.1,2742 ; 2541.1,2755 2541.1,2852.5 ; 2541.1,2862.9 2541.1,2895.4 ; 2542.4,2709.5 2542.4,2739.4 ; 2542.4,2756.3 2542.4,2846 ; 2542.4,2862.9 2542.4,2894.1 ; 2543.7,2709.5 2543.7,2739.4 ; 2543.7,2749.8 2543.7,2752.4 ; 2543.7,2756.3 2543.7,2846 ; 2543.7,2862.9 2543.7,2892.8 ; 2545,2709.5 2545,2738.1 ; 2545,2749.8 2545,2751.1 ; 2545,2755 2545,2836.9 ; 2545,2838.2 2545,2844.7 ; 2545,2862.9 2545,2891.5 ; 2546.3,2708.2 2546.3,2738.1 ; 2546.3,2748.5 2546.3,2751.1 ; 2546.3,2755 2546.3,2761.5 ; 2546.3,2762.8 2546.3,2829.1 ; 2546.3,2830.4 2546.3,2835.6 ; 2546.3,2838.2 2546.3,2846 ; 2546.3,2862.9 2546.3,2888.9 ; 2547.6,2706.9 2547.6,2738.1 ; 2547.6,2742 2547.6,2743.3 ; 2547.6,2747.2 2547.6,2749.8 ; 2547.6,2753.7 2547.6,2760.2 ; 2547.6,2770.6 2547.6,2829.1 ; 2547.6,2833 2547.6,2835.6 ; 2547.6,2839.5 2547.6,2846 ; 2547.6,2862.9 2547.6,2887.6 ; 2548.9,2706.9 2548.9,2738.1 ; 2548.9,2742 2548.9,2743.3 ; 2548.9,2747.2 2548.9,2749.8 ; 2548.9,2752.4 2548.9,2760.2 ; 2548.9,2770.6 2548.9,2825.2 ; 2548.9,2827.8 2548.9,2830.4 ; 2548.9,2842.1 2548.9,2846 ; 2548.9,2866.8 2548.9,2886.3 ; 2550.2,2706.9 2550.2,2738.1 ; 2550.2,2745.9 2550.2,2748.5 ; 2550.2,2752.4 2550.2,2758.9 ; 2550.2,2762.8 2550.2,2764.1 ; 2550.2,2773.2 2550.2,2810.9 ; 2550.2,2818.7 2550.2,2825.2 ; 2550.2,2842.1 2550.2,2846 ; 2550.2,2866.8 2550.2,2883.7 ; 2551.5,2705.6 2551.5,2738.1 ; 2551.5,2744.6 2551.5,2748.5 ; 2551.5,2752.4 2551.5,2758.9 ; 2551.5,2764.1 2551.5,2765.4 ; 2551.5,2775.8 2551.5,2804.4 ; 2551.5,2820 2551.5,2825.2 ; 2551.5,2842.1 2551.5,2847.3 ; 2551.5,2849.9 2551.5,2851.2 ; 2551.5,2853.8 2551.5,2855.1 ; 2551.5,2866.8 2551.5,2882.4 ; 2552.8,2705.6 2552.8,2739.4 ; 2552.8,2742 2552.8,2747.2 ; 2552.8,2751.1 2552.8,2758.9 ; 2552.8,2768 2552.8,2771.9 ; 2552.8,2775.8 2552.8,2779.7 ; 2552.8,2797.9 2552.8,2803.1 ; 2552.8,2810.9 2552.8,2816.1 ; 2552.8,2820 2552.8,2823.9 ; 2552.8,2842.1 2552.8,2848.6 ; 2552.8,2853.8 2552.8,2855.1 ; 2552.8,2857.7 2552.8,2860.3 ; 2552.8,2866.8 2552.8,2881.1 ; 2554.1,2705.6 2554.1,2745.9 ; 2554.1,2753.7 2554.1,2757.6 ; 2554.1,2761.5 2554.1,2764.1 ; 2554.1,2775.8 2554.1,2787.5 ; 2554.1,2797.9 2554.1,2801.8 ; 2554.1,2807 2554.1,2808.3 ; 2554.1,2810.9 2554.1,2813.5 ; 2554.1,2820 2554.1,2823.9 ; 2554.1,2838.2 2554.1,2848.6 ; 2554.1,2853.8 2554.1,2855.1 ; 2554.1,2857.7 2554.1,2860.3 ; 2554.1,2865.5 2554.1,2877.2 ; 2555.4,2705.6 2555.4,2745.9 ; 2555.4,2753.7 2555.4,2757.6 ; 2555.4,2761.5 2555.4,2764.1 ; 2555.4,2774.5 2555.4,2787.5 ; 2555.4,2790.1 2555.4,2804.4 ; 2555.4,2820 2555.4,2825.2 ; 2555.4,2831.7 2555.4,2833 ; 2555.4,2843.4 2555.4,2848.6 ; 2555.4,2851.2 2555.4,2853.8 ; 2555.4,2857.7 2555.4,2874.6 ; 2556.7,2706.9 2556.7,2747.2 ; 2556.7,2752.4 2556.7,2757.6 ; 2556.7,2766.7 2556.7,2770.6 ; 2556.7,2774.5 2556.7,2787.5 ; 2556.7,2790.1 2556.7,2801.8 ; 2556.7,2821.3 2556.7,2825.2 ; 2556.7,2827.8 2556.7,2833 ; 2556.7,2843.4 2556.7,2848.6 ; 2556.7,2852.5 2556.7,2853.8 ; 2556.7,2856.4 2556.7,2874.6 ; 2558,2709.5 2558,2749.8 ; 2558,2751.1 2558,2760.2 ; 2558,2768 2558,2770.6 ; 2558,2774.5 2558,2787.5 ; 2558,2790.1 2558,2803.1 ; 2558,2820 2558,2829.1 ; 2558,2839.5 2558,2849.9 ; 2558,2852.5 2558,2853.8 ; 2558,2856.4 2558,2874.6 ; 2559.3,2710.8 2559.3,2762.8 ; 2559.3,2773.2 2559.3,2787.5 ; 2559.3,2790.1 2559.3,2804.4 ; 2559.3,2810.9 2559.3,2812.2 ; 2559.3,2818.7 2559.3,2826.5 ; 2559.3,2838.2 2559.3,2851.2 ; 2559.3,2852.5 2559.3,2874.6 ; 2560.6,2713.4 2560.6,2762.8 ; 2560.6,2765.4 2560.6,2766.7 ; 2560.6,2773.2 2560.6,2787.5 ; 2560.6,2790.1 2560.6,2804.4 ; 2560.6,2821.3 2560.6,2826.5 ; 2560.6,2830.4 2560.6,2835.6 ; 2560.6,2839.5 2560.6,2874.6 ; 2561.9,2714.7 2561.9,2740.7 ; 2561.9,2742 2561.9,2762.8 ; 2561.9,2766.7 2561.9,2769.3 ; 2561.9,2774.5 2561.9,2787.5 ; 2561.9,2790.1 2561.9,2803.1 ; 2561.9,2820 2561.9,2831.7 ; 2561.9,2833 2561.9,2834.3 ; 2561.9,2839.5 2561.9,2873.3 ; 2563.2,2717.3 2563.2,2738.1 ; 2563.2,2745.9 2563.2,2762.8 ; 2563.2,2774.5 2563.2,2787.5 ; 2563.2,2790.1 2563.2,2803.1 ; 2563.2,2808.3 2563.2,2809.6 ; 2563.2,2817.4 2563.2,2831.7 ; 2563.2,2838.2 2563.2,2870.7 ; 2564.5,2719.9 2564.5,2736.8 ; 2564.5,2748.5 2564.5,2765.4 ; 2564.5,2773.2 2564.5,2787.5 ; 2564.5,2790.1 2564.5,2804.4 ; 2564.5,2808.3 2564.5,2813.5 ; 2564.5,2821.3 2564.5,2831.7 ; 2564.5,2836.9 2564.5,2869.4 ; 2565.8,2721.2 2565.8,2734.2 ; 2565.8,2751.1 2565.8,2769.3 ; 2565.8,2771.9 2565.8,2779.7 ; 2565.8,2786.2 2565.8,2787.5 ; 2565.8,2791.4 2565.8,2805.7 ; 2565.8,2821.3 2565.8,2869.4 ; 2567.1,2723.8 2567.1,2732.9 ; 2567.1,2753.7 2567.1,2779.7 ; 2567.1,2797.9 2567.1,2805.7 ; 2567.1,2817.4 2567.1,2868.1 ; 2568.4,2726.4 2568.4,2731.6 ; 2568.4,2756.3 2568.4,2779.7 ; 2568.4,2797.9 2568.4,2807 ; 2568.4,2808.3 2568.4,2865.5 ; 2569.7,2758.9 2569.7,2862.9 ; 2571,2760.2 2571,2859 ; 2572.3,2760.2 2572.3,2855.1 ; 2573.6,2760.2 2573.6,2851.2 ; 2574.9,2761.5 2574.9,2838.2 ; 2574.9,2844.7 2574.9,2847.3 ; 2576.2,2761.5 2576.2,2834.3 ; 2577.5,2761.5 2577.5,2803.1 ; 2577.5,2808.3 2577.5,2833 ; 2578.8,2762.8 2578.8,2792.7 ; 2578.8,2808.3 2578.8,2826.5 ; 2580.1,2764.1 2580.1,2791.4 ; 2581.4,2768 2581.4,2790.1 ; 2590.5,2675.7 2590.5,2677 ; 2590.5,2709.5 2590.5,2712.1 ; 2590.5,2735.5 2590.5,2738.1 ; 2590.5,2852.5 2590.5,2853.8 ; 2591.8,2674.4 2591.8,2678.3 ; 2591.8,2700.4 2591.8,2704.3 ; 2591.8,2708.2 2591.8,2712.1 ; 2591.8,2735.5 2591.8,2739.4 ; 2591.8,2770.6 2591.8,2773.2 ; 2591.8,2833 2591.8,2834.3 ; 2591.8,2851.2 2591.8,2855.1 ; 2591.8,2881.1 2591.8,2882.4 ; 2591.8,2913.6 2591.8,2917.5 ; 2593.1,2674.4 2593.1,2678.3 ; 2593.1,2699.1 2593.1,2706.9 ; 2593.1,2708.2 2593.1,2713.4 ; 2593.1,2735.5 2593.1,2739.4 ; 2593.1,2760.2 2593.1,2764.1 ; 2593.1,2769.3 2593.1,2773.2 ; 2593.1,2797.9 2593.1,2800.5 ; 2593.1,2820 2593.1,2823.9 ; 2593.1,2831.7 2593.1,2835.6 ; 2593.1,2851.2 2593.1,2856.4 ; 2593.1,2879.8 2593.1,2883.7 ; 2593.1,2891.5 2593.1,2894.1 ; 2593.1,2912.3 2593.1,2918.8 ; 2594.4,2674.4 2594.4,2678.3 ; 2594.4,2699.1 2594.4,2712.1 ; 2594.4,2729 2594.4,2732.9 ; 2594.4,2735.5 2594.4,2739.4 ; 2594.4,2758.9 2594.4,2764.1 ; 2594.4,2770.6 2594.4,2773.2 ; 2594.4,2790.1 2594.4,2791.4 ; 2594.4,2797.9 2594.4,2801.8 ; 2594.4,2818.7 2594.4,2823.9 ; 2594.4,2833 2594.4,2835.6 ; 2594.4,2852.5 2594.4,2856.4 ; 2594.4,2860.3 2594.4,2865.5 ; 2594.4,2879.8 2594.4,2883.7 ; 2594.4,2891.5 2594.4,2894.1 ; 2594.4,2912.3 2594.4,2918.8 ; 2595.7,2674.4 2595.7,2678.3 ; 2595.7,2704.3 2595.7,2706.9 ; 2595.7,2708.2 2595.7,2713.4 ; 2595.7,2727.7 2595.7,2732.9 ; 2595.7,2734.2 2595.7,2742 ; 2595.7,2757.6 2595.7,2760.2 ; 2595.7,2761.5 2595.7,2765.4 ; 2595.7,2770.6 2595.7,2773.2 ; 2595.7,2790.1 2595.7,2792.7 ; 2595.7,2797.9 2595.7,2801.8 ; 2595.7,2818.7 2595.7,2825.2 ; 2595.7,2833 2595.7,2836.9 ; 2595.7,2848.6 2595.7,2866.8 ; 2595.7,2878.5 2595.7,2883.7 ; 2595.7,2891.5 2595.7,2895.4 ; 2595.7,2911 2595.7,2918.8 ; 2597,2674.4 2597,2678.3 ; 2597,2697.8 2597,2699.1 ; 2597,2700.4 2597,2714.7 ; 2597,2727.7 2597,2742 ; 2597,2757.6 2597,2758.9 ; 2597,2760.2 2597,2762.8 ; 2597,2770.6 2597,2773.2 ; 2597,2790.1 2597,2792.7 ; 2597,2796.6 2597,2803.1 ; 2597,2817.4 2597,2825.2 ; 2597,2833 2597,2836.9 ; 2597,2846 2597,2866.8 ; 2597,2878.5 2597,2883.7 ; 2597,2890.2 2597,2895.4 ; 2597,2911 2597,2921.4 ; 2598.3,2673.1 2598.3,2680.9 ; 2598.3,2697.8 2598.3,2714.7 ; 2598.3,2726.4 2598.3,2743.3 ; 2598.3,2758.9 2598.3,2762.8 ; 2598.3,2765.4 2598.3,2774.5 ; 2598.3,2787.5 2598.3,2803.1 ; 2598.3,2817.4 2598.3,2825.2 ; 2598.3,2827.8 2598.3,2829.1 ; 2598.3,2833 2598.3,2836.9 ; 2598.3,2846 2598.3,2864.2 ; 2598.3,2878.5 2598.3,2883.7 ; 2598.3,2888.9 2598.3,2895.4 ; 2598.3,2909.7 2598.3,2913.6 ; 2598.3,2917.5 2598.3,2924 ; 2599.6,2671.8 2599.6,2682.2 ; 2599.6,2696.5 2599.6,2714.7 ; 2599.6,2725.1 2599.6,2742 ; 2599.6,2758.9 2599.6,2762.8 ; 2599.6,2765.4 2599.6,2774.5 ; 2599.6,2786.2 2599.6,2803.1 ; 2599.6,2816.1 2599.6,2825.2 ; 2599.6,2827.8 2599.6,2830.4 ; 2599.6,2833 2599.6,2836.9 ; 2599.6,2847.3 2599.6,2862.9 ; 2599.6,2875.9 2599.6,2895.4 ; 2599.6,2908.4 2599.6,2912.3 ; 2599.6,2918.8 2599.6,2926.6 ; 2600.9,2667.9 2600.9,2682.2 ; 2600.9,2695.2 2600.9,2713.4 ; 2600.9,2723.8 2600.9,2729 ; 2600.9,2732.9 2600.9,2742 ; 2600.9,2757.6 2600.9,2764.1 ; 2600.9,2765.4 2600.9,2774.5 ; 2600.9,2786.2 2600.9,2794 ; 2600.9,2796.6 2600.9,2801.8 ; 2600.9,2816.1 2600.9,2823.9 ; 2600.9,2827.8 2600.9,2830.4 ; 2600.9,2834.3 2600.9,2836.9 ; 2600.9,2847.3 2600.9,2866.8 ; 2600.9,2874.6 2600.9,2896.7 ; 2600.9,2907.1 2600.9,2911 ; 2600.9,2912.3 2600.9,2918.8 ; 2600.9,2921.4 2600.9,2929.2 ; 2602.2,2667.9 2602.2,2680.9 ; 2602.2,2695.2 2602.2,2710.8 ; 2602.2,2723.8 2602.2,2727.7 ; 2602.2,2731.6 2602.2,2742 ; 2602.2,2753.7 2602.2,2769.3 ; 2602.2,2770.6 2602.2,2774.5 ; 2602.2,2787.5 2602.2,2792.7 ; 2602.2,2796.6 2602.2,2801.8 ; 2602.2,2814.8 2602.2,2823.9 ; 2602.2,2827.8 2602.2,2831.7 ; 2602.2,2834.3 2602.2,2836.9 ; 2602.2,2847.3 2602.2,2868.1 ; 2602.2,2874.6 2602.2,2883.7 ; 2602.2,2887.6 2602.2,2898 ; 2602.2,2905.8 2602.2,2918.8 ; 2602.2,2922.7 2602.2,2929.2 ; 2603.5,2669.2 2603.5,2677 ; 2603.5,2696.5 2603.5,2712.1 ; 2603.5,2722.5 2603.5,2726.4 ; 2603.5,2729 2603.5,2742 ; 2603.5,2752.4 2603.5,2764.1 ; 2603.5,2765.4 2603.5,2774.5 ; 2603.5,2790.1 2603.5,2792.7 ; 2603.5,2795.3 2603.5,2803.1 ; 2603.5,2814.8 2603.5,2823.9 ; 2603.5,2827.8 2603.5,2831.7 ; 2603.5,2834.3 2603.5,2836.9 ; 2603.5,2847.3 2603.5,2868.1 ; 2603.5,2875.9 2603.5,2882.4 ; 2603.5,2887.6 2603.5,2898 ; 2603.5,2904.5 2603.5,2909.7 ; 2603.5,2913.6 2603.5,2920.1 ; 2604.8,2670.5 2604.8,2675.7 ; 2604.8,2701.7 2604.8,2712.1 ; 2604.8,2729 2604.8,2742 ; 2604.8,2752.4 2604.8,2762.8 ; 2604.8,2765.4 2604.8,2775.8 ; 2604.8,2790.1 2604.8,2803.1 ; 2604.8,2814.8 2604.8,2831.7 ; 2604.8,2834.3 2604.8,2836.9 ; 2604.8,2847.3 2604.8,2866.8 ; 2604.8,2877.2 2604.8,2883.7 ; 2604.8,2886.3 2604.8,2891.5 ; 2604.8,2892.8 2604.8,2899.3 ; 2604.8,2903.2 2604.8,2908.4 ; 2604.8,2913.6 2604.8,2920.1 ; 2606.1,2670.5 2606.1,2677 ; 2606.1,2701.7 2606.1,2712.1 ; 2606.1,2731.6 2606.1,2739.4 ; 2606.1,2753.7 2606.1,2775.8 ; 2606.1,2786.2 2606.1,2787.5 ; 2606.1,2790.1 2606.1,2804.4 ; 2606.1,2814.8 2606.1,2826.5 ; 2606.1,2834.3 2606.1,2836.9 ; 2606.1,2846 2606.1,2866.8 ; 2606.1,2877.2 2606.1,2899.3 ; 2606.1,2904.5 2606.1,2907.1 ; 2606.1,2911 2606.1,2920.1 ; 2607.4,2669.2 2607.4,2677 ; 2607.4,2700.4 2607.4,2713.4 ; 2607.4,2732.9 2607.4,2739.4 ; 2607.4,2755 2607.4,2775.8 ; 2607.4,2784.9 2607.4,2787.5 ; 2607.4,2790.1 2607.4,2803.1 ; 2607.4,2816.1 2607.4,2826.5 ; 2607.4,2833 2607.4,2836.9 ; 2607.4,2844.7 2607.4,2860.3 ; 2607.4,2862.9 2607.4,2866.8 ; 2607.4,2877.2 2607.4,2896.7 ; 2607.4,2909.7 2607.4,2921.4 ; 2608.7,2669.2 2608.7,2679.6 ; 2608.7,2700.4 2608.7,2713.4 ; 2608.7,2731.6 2608.7,2739.4 ; 2608.7,2755 2608.7,2774.5 ; 2608.7,2783.6 2608.7,2787.5 ; 2608.7,2790.1 2608.7,2803.1 ; 2608.7,2817.4 2608.7,2825.2 ; 2608.7,2833 2608.7,2836.9 ; 2608.7,2844.7 2608.7,2859 ; 2608.7,2862.9 2608.7,2866.8 ; 2608.7,2877.2 2608.7,2895.4 ; 2608.7,2908.4 2608.7,2921.4 ; 2610,2667.9 2610,2671.8 ; 2610,2675.7 2610,2684.8 ; 2610,2701.7 2610,2712.1 ; 2610,2729 2610,2743.3 ; 2610,2753.7 2610,2761.5 ; 2610,2762.8 2610,2774.5 ; 2610,2783.6 2610,2805.7 ; 2610,2817.4 2610,2825.2 ; 2610,2833 2610,2835.6 ; 2610,2844.7 2610,2855.1 ; 2610,2862.9 2610,2866.8 ; 2610,2877.2 2610,2881.1 ; 2610,2882.4 2610,2894.1 ; 2610,2909.7 2610,2922.7 ; 2611.3,2665.3 2611.3,2670.5 ; 2611.3,2677 2611.3,2686.1 ; 2611.3,2703 2611.3,2710.8 ; 2611.3,2727.7 2611.3,2744.6 ; 2611.3,2755 2611.3,2761.5 ; 2611.3,2770.6 2611.3,2774.5 ; 2611.3,2784.9 2611.3,2808.3 ; 2611.3,2818.7 2611.3,2823.9 ; 2611.3,2830.4 2611.3,2835.6 ; 2611.3,2846 2611.3,2853.8 ; 2611.3,2862.9 2611.3,2866.8 ; 2611.3,2877.2 2611.3,2887.6 ; 2611.3,2890.2 2611.3,2892.8 ; 2611.3,2909.7 2611.3,2922.7 ; 2612.6,2665.3 2612.6,2667.9 ; 2612.6,2679.6 2612.6,2687.4 ; 2612.6,2703 2612.6,2709.5 ; 2612.6,2729 2612.6,2744.6 ; 2612.6,2758.9 2612.6,2761.5 ; 2612.6,2770.6 2612.6,2773.2 ; 2612.6,2786.2 2612.6,2792.7 ; 2612.6,2796.6 2612.6,2799.2 ; 2612.6,2800.5 2612.6,2808.3 ; 2612.6,2820 2612.6,2822.6 ; 2612.6,2830.4 2612.6,2835.6 ; 2612.6,2849.9 2612.6,2852.5 ; 2612.6,2862.9 2612.6,2865.5 ; 2612.6,2878.5 2612.6,2886.3 ; 2612.6,2911 2612.6,2922.7 ; 2613.9,2703 2613.9,2706.9 ; 2613.9,2730.3 2613.9,2736.8 ; 2613.9,2770.6 2613.9,2773.2 ; 2613.9,2830.4 2613.9,2834.3 ; 2613.9,2862.9 2613.9,2865.5 ; 2613.9,2879.8 2613.9,2882.4 ; 2613.9,2912.3 2613.9,2917.5 ; 2615.2,2704.3 2615.2,2706.9 ; 2615.2,2770.6 2615.2,2771.9

## Polygon pours and split planes (outlines as drawn)
GND on Top Layer "Top Layer-No Net" (solid, remove dead copper, shelved, pour order 42): 1856.92,731.87 311.46,2277.34 cw(c358.78,2324.66) 311.46,2371.99 1856.92,3917.46 cw(c1904.25,3870.13) 1951.58,3917.46 2326.54,3542.49 ccw(c2447.52,3410.38) 2579.63,3289.4 2826.27,3042.76 2826.27,1606.57 2579.63,1359.93 ccw(c2447.52,1238.95) 2326.54,1106.84 1951.58,731.87 cw(c1904.25,779.2)

## Keep-outs
Top Layer:
  lines w10: 2300,2620 2640,2620 2640,2960 2300,2960 2300,2620

## Silkscreen, mask and mechanical layers (free items; w line width, h text height)
Top Overlay:
  text "GND" at 2350,2460 h60
  text "TX1" at 2370,2360 h60
  text "RX1" at 2369.5,2260 h60
  text "VCC" at 2350,2160 h60
  text "GND" at 1170,1630 h40 r45
  text "SWCLK" at 1240,1570 h40 r45
  text "SWDIO" at 1310,1490 h40 r45
  text "3.3V" at 1390,1420 h40 r45
Bottom Overlay:
  text "VCC" at 1745.59,3542.49 h50
  text "B" at 1890,3542.49 h50
  text "GND" at 1740.59,3430 h50
  text "A" at 1910,3430 h50
  text "A" at 1843.5,1230 h50
  text "GND" at 2070,1230 h50
  text "B" at 1850,1130 h50
  text "VCC" at 2070,1130 h50
Top Solder:
  rectangle: 2300,2620 2640,2960
Mechanical 1:
  lines w0.5: 311.69,2276.93 cw(c359.01,2324.26) 311.69,2371.59 1857.15,3917.05 cw(c1904.48,3869.73) 1951.8,3917.05 2326.77,3542.09 ccw(c2447.74,3409.97) 2579.86,3289 2826.5,3042.36 2826.5,1606.16 2579.86,1359.52 ccw(c2447.74,1238.54) 2326.77,1106.43 1951.8,731.47 cw(c1904.48,778.79) 1857.15,731.47 311.69,2276.93

## Text inside footprints (layer, text, board x,y; h text height)
U2: Top Overlay "RST" at 1470,2670 h40 r90; Top Overlay "BOOT0" at 1375,2667.61 h40 r90; Top Overlay "SCL" at 1275,2670 h40 r90; Top Overlay "SDA" at 1170,2667.61 h40 r90; Top Overlay "GY-25" at 1060,2277.34 h100 r90; Top Overlay "VIN" at 1160,1960 h40 r90; Top Overlay "RX" at 1270,1970 h40 r90; Top Overlay "TX" at 1370,1972.62 h40 r90; Top Overlay "GND" at 1470,1960 h40 r90
U3: Top Overlay "SDA" at 1920,1663.71 h50 r90; Top Overlay "SCL" at 2024.43,1663.71 h50 r90; Top Overlay "VCC" at 2120,1663.71 h50 r90; Top Overlay "GND" at 2220,1663.71 h50 r90